# EAGLE board ConnectorBoard (EAGLE 6.2)
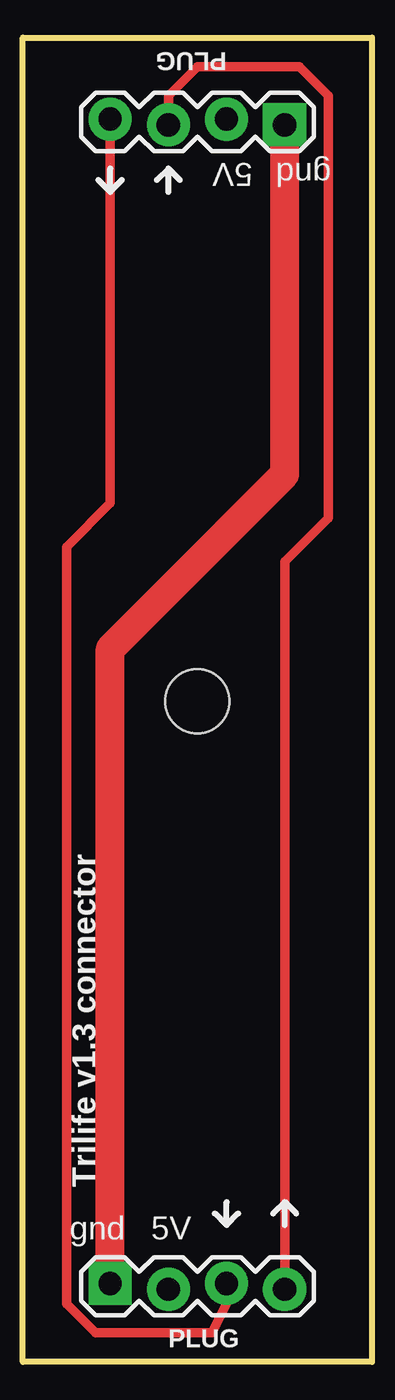
[diagram p0: board, top side]
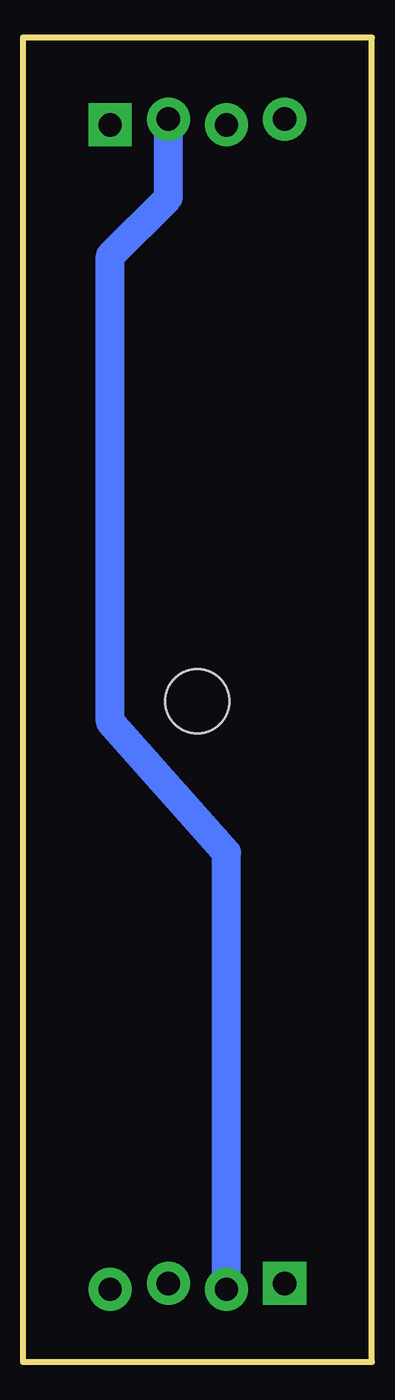
[diagram p1: board, bottom side, seen from below]

No outline drawn. Coordinates in mm, seen from the top.
Copper layers (1*16): Top 0.035mm / dielectric 1.5mm / Bottom 0.035mm
Design rules: minimum track width 10mil, minimum drill 24mil, track to track 8mil, track to pad 8mil, pad to pad 8mil, via to via 8mil, smd to smd 8mil, copper to edge 40mil, drill to drill 8mil, minimum pad ring 10mil, minimum via ring 8mil, stop-mask expansion 4mil, vias tented up to drill 0mil, thermal gap 10mil
Holes 2.8 mm at 7.62,29.46
Milling: 4 lines

## Footprints (pad centres in the part's own frame; a part is rotated, then mirrored left to right if it is on the bottom)
1X04_LOCK = drill 1.016 pad 1.88 square: 1 0,0.127 | drill 1.016 pad 1.88: 2 2.54,-0.127; 3 5.08,0.127; 4 7.62,-0.127

## Placement (x,y rotation side)
E$3  [1X04_LOCK]  3.81,3.94 0 top
E$4  [1X04_LOCK]  11.43,54.74 180 top

## Library data of the parts
E$3 E$4 = SparkFun

## Nets
S$5: E$4.1
S$6: E$3.2
S$8: E$3.4 E$4.3

## Tracks (layer width: path | path; a pad name or v marks a point on that pad's centre or on a via)
S$5
  Top 1.27: 3.81,3.81 3.81,31.75 11.43,39.37 E$4.1
S$6
  Bottom 1.27: E$3.2 6.35,22.86 11.43,28.57 11.43,48.9 8.89,51.44 8.89,54.61
S$7
  Top 0.406: 3.81,54.61 3.81,38.1 1.91,36.2 1.91,3.17 3.17,1.91 8.26,1.91 8.89,3.17 8.89,3.81
S$8
  Top 0.406: E$3.4 11.43,35.56 13.34,37.47 13.34,55.88 12.06,57.15 7.62,57.15 6.35,55.88 E$4.3

## Text on the board
tPlace: PLUG | 5V | gnd | Trilife v1.3 connector | gnd | 5V | PLUG